# Altium PCB 400926.PcbDoc (part 3 of 7)
Units mm, origin at the board's own origin, x right, y up, seen from the top; angles counter-clockwise.
Board outline 148.5 x 63.5 mm, 4 copper layers (Top Layer, Mid-Layer 1, Mid-Layer 2, Bottom Layer), stack 1.514 mm thick; 311 components, 281 nets, 1495 pads, 2232 vias.
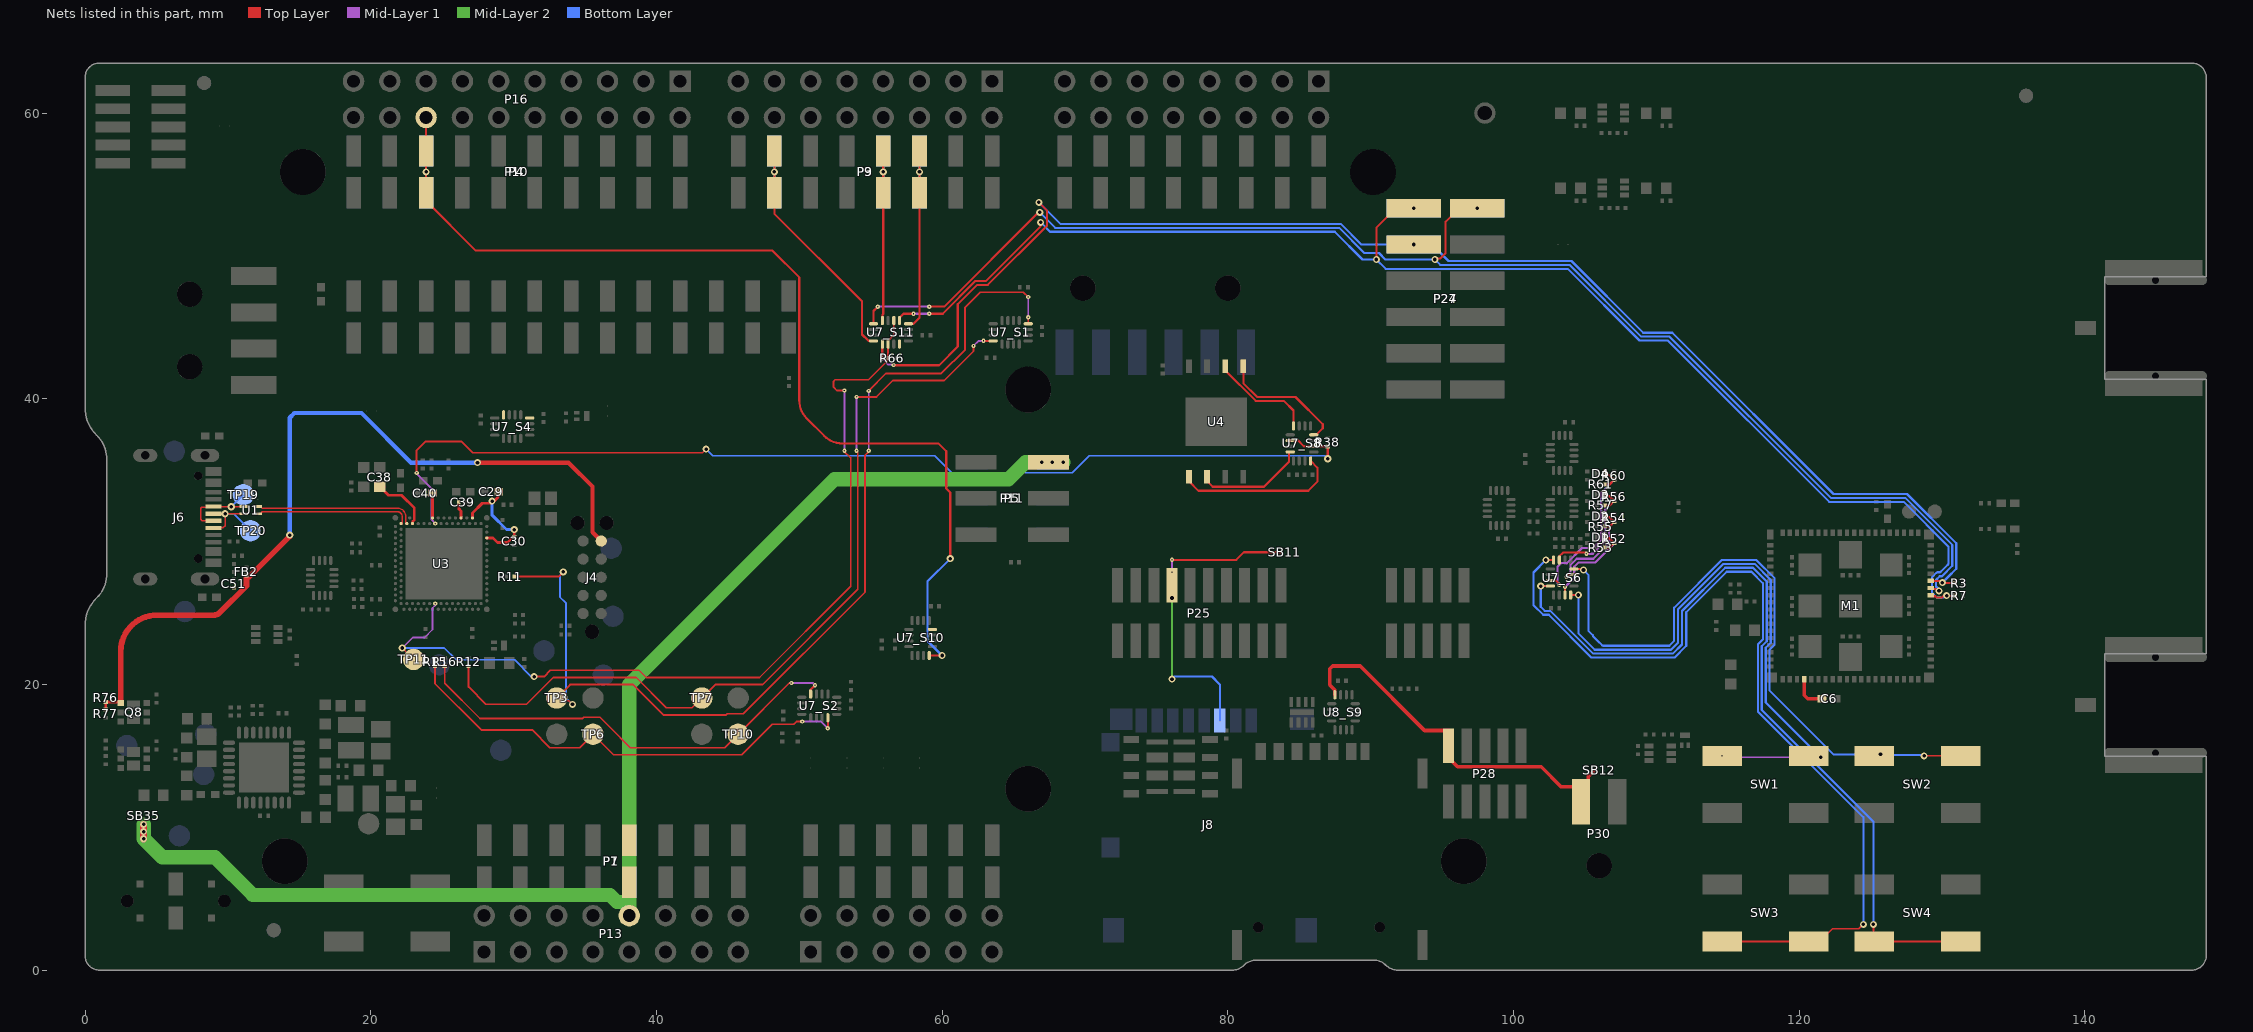
[diagram p4: the nets of this part, all layers, seen from the top]

## Part data (continued)
P26: library part "Socket 1x13 SMD, N.C.", "Socket 1x13, 2.54mm (100mil), SMD", Manufacturer=WCON, Manufacturer Part Number=2171-113MS0CUNR1, Part number IPS=N.A., Part number NEMS=100500422, Artikkelnr Noca=N.A., Assembly="Not mounted", Author=rsk, Component Class=Connectors, Component Status=Active, ComponentLink1Description=Datasheet, ComponentLink1URL=N.A., ComponentLink2Description="Supplier link", ComponentLink2URL=N.A., Footprint Doc=SOCKET_1x13_SMD, HelpURL=N.A., LatestRevisionDate=2019-05-27, Note=N.A., Pad Count=13, Part Number="Socket 1x13 SMD, N.C.", Part number Norautron=N.A., PartId=100500422, Published=2019-05-27, Supplier 1=Cabcon, Supplier 2=Samtec, Supplier Part Number 1=2171-113MS0CUNR1, Supplier Part Number 2=SSM-113-L-SV-P-TR, System=Connector
P28: library part "Pin Header 2x5 SMD, 1.27mm", "Pin Header 2x5, 1.27mm (50mil), SMD", Manufacturer=WCON, Manufacturer Part Number=1325-1205S0M078CR03, Part number IPS=N.A., Part number NEMS=100500259, Artikkelnr Noca=N.A., Author=rsk, Component Class=Connectors, Component Status=Active, ComponentLink1Description=Datasheet, ComponentLink1URL=N.A., ComponentLink2Description="Supplier link", ComponentLink2URL=N.A., Footprint Doc=HDR_2x5-SMD-1.27mm, HelpURL=http://www.farnell.com/datasheets/81359.pdf, LatestRevisionDate=2024-02-02, Note="(Replaced 1325-1205S0M078R1)", Pad Count=10, Part Number="Pin Header 2x5 SMD, 1.27mm", Part number Norautron=N.A., PartId=100500259, Published=2010-11-25, Supplier 1=Cabcon, Supplier 2=N.A., Supplier Part Number 1=1325-1205S0M078CR03, Supplier Part Number 2=N.A., System=Connector
P29: library part "Pin List Ang 1x6 SMD, 2.54mm", "Pin List 1x6, 2.54mm (100mil), Right Angled, SMD", Manufacturer=N.A., Part number IPS=00000003922, Part number NEMS=100500362, Supplier Part Number 1=TSM-106-01-L-SH-A, Artikkelnr Noca=N.A., Assembly="Not mounted", Author=rsk, Component Class=Connectors, Component Status=Active, ComponentLink1Description=Datasheet, ComponentLink1URL=N.A., ComponentLink2Description="Supplier link", ComponentLink2URL=N.A., Footprint Doc=LIST_ANG_1x6-SMD-2.54MM, HelpURL=N.A., LatestRevisionDate=2020-04-28, Manufacturer Part Number=N.A., Note=N.A., Pad Count=6, Part Number="Pin List Ang 1x6 SMD, 2.54mm", Part number Norautron=N.A., PartId=100500362, Published=2015-01-23, Supplier 1=Samtec, Supplier 2=Digi-Key, Supplier Part Number 2=S1113E-06-ND, System=Connector
P30: library part "Pin List Ang 1x2 SMD, 2.54mm", "Pin List 1x2, 2.54mm (100mil), Right Angled, SMD", Manufacturer=WCON, Manufacturer Part Number=1125B-1102S0Z135CR06, Part number IPS=N.A., Part number NEMS=100500354, Artikkelnr Noca=N.A., Author=rsk, Component Class=Connectors, Component Status=Active, ComponentLink1Description=Datasheet, ComponentLink1URL=N.A., ComponentLink2Description="Supplier link", ComponentLink2URL=N.A., Footprint Doc=LIST_ANG_1x2-SMD-2.54MM, HelpURL=\\hizz\pro\app9717\Datasheet\connectors\W-CON\1125B-11XXXXZXXXXX.pdf, LatestRevisionDate=2024-02-02, Note="(Replaced 1125B-1102S0Z135R2)", Pad Count=2, Part Number="Pin List Ang 1x2 SMD, 2.54mm", Part number Norautron=N.A., PartId=100500354, Published=2016-01-22, Supplier 1=Cabcon, Supplier 2=N.A., Supplier Part Number 1=1125B-1102S0Z135CR06, Supplier Part Number 2=N.A., System=Connector
Q1 Q7: "Dual N & P Ch MOFET, 1.03A/0.7A, 480mOhm, 450mW", Manufacturer="Diodes Incorporated", Part number IPS=00000007803, Part number NEMS=101300117, Part number Norautron=N.A., Supplier Part Number 1=DMC2400UV-7DICT-ND, Artikkelnr Noca=N.A., Author=rsk, Component Class=Semiconductors, Component Status=Active, ComponentLink1Description=Datasheet, ComponentLink1URL=N.A., ComponentLink2Description="Supplier link", ComponentLink2URL=N.A., Footprint Doc=SOT-563, HelpURL=http://www.diodes.com/_files/datasheets/DMC2400UV.pdf, LatestRevisionDate=2016-01-18, Manufacturer Part Number=DMC2400UV, Note="Dual N & P Channel Digital FET", Pad Count=6, Part Number=DMC2400UV, PartId=101300117, Published=2016-01-18, Supplier 1=Digi-Key, Supplier 2=N.A., Supplier Part Number 2=N.A.
Q2 Q3 Q6: "N-Channel MOSFET, 20V, 1A, 470mOhm, 400mW, -55°C ~ 150°C", Manufacturer="Rohm Semiconductor", Part number IPS=00000009976, Part number NEMS=101300132, Part number Norautron=26320026, Supplier Part Number 1=RV2C010UNT2LCT-ND, Artikkelnr Noca=35010020, Author=rsk, Component Class=Semiconductors, Component Status=Active, ComponentLink1Description=Datasheet, ComponentLink1URL=N.A., ComponentLink2Description="Supplier link", ComponentLink2URL=N.A., Footprint Doc=DFN-3, HelpURL=http://rohmfs.rohm.com/en/products/databook/datasheet/discrete/transistor/mosfet/rv2c010unt2l-e.pdf, LatestRevisionDate=2024-09-18, Manufacturer Part Number=RV2C010UNT2L, Note=N.A., Pad Count=3, Part Number=RV2C010UNT2L, PartId=101300132, Published=2016-08-09, Supplier 1=Digi-Key, Supplier 2=Mouser, Supplier Part Number 2=755-RV2C010UNT2L
Q4 Q5: "Dual N-Channel MOSFET, Vds = 30V, Vgs(th) = 1.5V, Id = 0.5A, Rds = 750mOhm, Pd = 150mW, -55°C ~ 150°C", Manufacturer="Micro Commercial Components", Manufacturer Part Number=UM6X1NA-TP, Part number IPS=N.A., Part number NEMS=101300201, Supplier Part Number 1=353-UM6X1NA-TPCT-ND, Artikkelnr Noca=N.A., Author=rubr, Component Class=Semiconductors, Component Status=Active, ComponentLink1Description=Datasheet, ComponentLink1URL=https://www.mccsemi.com/pdf/Products/UM6X1NA(SOT-563).pdf, ComponentLink2Description="Supplier link", ComponentLink2URL=https://www.digikey.com/en/products/detail/micro-commercial-co/UM6X1NA-TP/16399159, Footprint Doc=SOT-563, HelpURL=https://www.mccsemi.com/product-detail/UM6X1NA, LatestRevisionDate=2024-09-18, Note=N.A., Pad Count=6, Part Number=UM6X1NA, Part number Norautron=N.A., PartId=101300201, Published=2023-01-19, Supplier 1=Digi-Key, Supplier 2=Mouser, Supplier Part Number 2=833-UM6X1NA-TP
Q8 Q9: "Dual P-Channel MOFET, 3.8A, 90mOhm max, 1.4W", Manufacturer="Micro Commercial Components", Part number IPS=N.A., Part number NEMS=101300199, Supplier Part Number 1=MCM2301-TPMSCT-ND, Artikkelnr Noca=N.A., Author=rubr, Component Class=Semiconductors, Component Status=Active, ComponentLink1Description=Datasheet, ComponentLink1URL=https://www.mccsemi.com/pdf/Products/MCM2301(DFN2020-6L).pdf, ComponentLink2Description="Supplier link", ComponentLink2URL=https://www.digikey.com/en/products/detail/micro-commercial-co/MCM2301-TP/9655971, Footprint Doc=VDFN-6, HelpURL=https://www.mccsemi.com/product-detail/MCM2301, LatestRevisionDate=2022-12-27, Manufacturer Part Number=MCM2301-TP, Note=N.A., Pad Count=6, Part Number=MCM2301-TP, Part number Norautron=N.A., PartId=101300199, Published=2022-12-27, Supplier 1=Digi-Key, Supplier 2=Mouser, Supplier Part Number 2=833-MCM2301-TP
R1 R8 R77 R79: library part R0201-10k, "Resistor, ±1%, 0.05W", Manufacturer=N.A., Part number IPS=00000001255, Part number NEMS=100100065, Part number Norautron=26107101, Artikkelnr Noca=N.A., Author=rsk, Component Class=Resistors, Component Status=Active, ComponentLink1Description=Datasheet, ComponentLink1URL=N.A., ComponentLink2Description="Supplier link", ComponentLink2URL=N.A., Footprint Doc=0201, HelpURL=N.A., LatestRevisionDate=2014-11-13, Manufacturer Part Number=N.A., Note="Chip Res 1%", Pad Count=2, Part Number=R0201-10k, PartId=100100065, Published=2014-11-13, Supplier 1=N.A., Supplier 2=N.A., Supplier Part Number 1=N.A., Supplier Part Number 2=N.A.
R2: library part R0201-1k0, "Resistor, ±1%, 0.05W", Manufacturer=N.A., Part number IPS=00000005786, Part number NEMS=100100043, Artikkelnr Noca=N.A., Author=rsk, Component Class=Resistors, Component Status=Active, ComponentLink1Description=Datasheet, ComponentLink1URL=N.A., ComponentLink2Description="Supplier link", ComponentLink2URL=N.A., Footprint Doc=0201, HelpURL=N.A., LatestRevisionDate=2014-11-13, Manufacturer Part Number=N.A., Note="Chip Res 1%", Pad Count=2, Part Number=R0201-1k0, Part number Norautron=N.A., PartId=100100043, Published=2014-11-13, Supplier 1=N.A., Supplier 2=N.A., Supplier Part Number 1=N.A., Supplier Part Number 2=N.A.
R3 R7 R13 R14 R17 R18 R24 R31 R32 R38 R43 R44 R45 R46 R47 R62 R66 R67 R69 R72 R73 R75 R80: library part R0201-1M0, "Resistor, ±1%, 0.05W", Manufacturer=N.A., Part number IPS=00000001418, Part number NEMS=100100093, Part number Norautron=26107108, Artikkelnr Noca=N.A., Author=rsk, Component Class=Resistors, Component Status=Active, ComponentLink1Description=Datasheet, ComponentLink1URL=N.A., ComponentLink2Description="Supplier link", ComponentLink2URL=N.A., Footprint Doc=0201, HelpURL=N.A., LatestRevisionDate=2014-11-13, Manufacturer Part Number=N.A., Note="Chip Res 1%", Pad Count=2, Part Number=R0201-1M0, PartId=100100093, Published=2014-11-13, Supplier 1=N.A., Supplier 2=N.A., Supplier Part Number 1=N.A., Supplier Part Number 2=N.A.
R9 R23 R59: library part R0201-N.C., "Not mounted", Manufacturer=N.A., Part number NEMS=100100107, Artikkelnr Noca=N.A., Assembly="Not mounted", Author=rsk, Component Class=Resistors, Component Status=Active, ComponentLink1Description=Datasheet, ComponentLink1URL=N.A., ComponentLink2Description="Supplier link", ComponentLink2URL=N.A., Footprint Doc=0201, HelpURL=N.A., LatestRevisionDate=2014-11-13, Manufacturer Part Number=N.A., Note="Chip Res", Pad Count=2, Part Number=R0201-N.C., Part number IPS=N.A., Part number Norautron=N.A., PartId=100100107, Published=2014-11-13, Supplier 1=N.A., Supplier 2=N.A., Supplier Part Number 1=N.A., Supplier Part Number 2=N.A.
R10 R34 R35 R52 R54 R56 R60 R63 R64 R65 R76 R81 R85 R86: library part R0201-100k, "Resistor, ±1%, 0.05W", Manufacturer=N.A., Part number IPS=00000001419, Part number NEMS=100100080, Part number Norautron=26108487, Artikkelnr Noca=N.A., Author=rsk, Component Class=Resistors, Component Status=Active, ComponentLink1Description=Datasheet, ComponentLink1URL=N.A., ComponentLink2Description="Supplier link", ComponentLink2URL=N.A., Footprint Doc=0201, HelpURL=N.A., LatestRevisionDate=2014-11-13, Manufacturer Part Number=N.A., Note="Chip Res 1%", Pad Count=2, Part Number=R0201-100k, PartId=100100080, Published=2014-11-13, Supplier 1=N.A., Supplier 2=N.A., Supplier Part Number 1=N.A., Supplier Part Number 2=N.A.
R11 R12 R15 R16 R19 R20 R22 R25 R26 R27 R28 R29 R30: library part R0201-150, "Resistor, ±1%, 0.05W", Manufacturer=N.A., Part number IPS=00000001420, Part number NEMS=100100029, Artikkelnr Noca=N.A., Author=rsk, Component Class=Resistors, Component Status=Active, ComponentLink1Description=Datasheet, ComponentLink1URL=N.A., ComponentLink2Description="Supplier link", ComponentLink2URL=N.A., Footprint Doc=0201, HelpURL=N.A., LatestRevisionDate=2014-11-13, Manufacturer Part Number=N.A., Note="Chip Res 1%", Pad Count=2, Part Number=R0201-150, Part number Norautron=N.A., PartId=100100029, Published=2014-11-13, Supplier 1=N.A., Supplier 2=N.A., Supplier Part Number 1=N.A., Supplier Part Number 2=N.A.
R21: library part R0201-2R2, "Resistor, ±1%, 0.05W", Manufacturer=N.A., Part number NEMS=100100006, Part number Norautron=26470029, Artikkelnr Noca=N.A., Author=rsk, Component Class=Resistors, Component Status=Active, ComponentLink1Description=Datasheet, ComponentLink1URL=N.A., ComponentLink2Description="Supplier link", ComponentLink2URL=N.A., Footprint Doc=0201, HelpURL=N.A., LatestRevisionDate=2014-11-13, Manufacturer Part Number=N.A., Note="Chip Res 1%", Pad Count=2, Part Number=R0201-2R2, Part number IPS=N.A., PartId=100100006, Published=2014-11-13, Supplier 1=N.A., Supplier 2=N.A., Supplier Part Number 1=N.A., Supplier Part Number 2=N.A.
R33 R39 R40 R41 R42: library part R0201-120, "Resistor, ±1%, 0.05W", Manufacturer=N.A., Part number IPS=00000000880, Part number NEMS=100100028, Part number Norautron=26107076, Artikkelnr Noca=N.A., Author=rsk, Component Class=Resistors, Component Status=Active, ComponentLink1Description=Datasheet, ComponentLink1URL=N.A., ComponentLink2Description="Supplier link", ComponentLink2URL=N.A., Footprint Doc=0201, HelpURL=N.A., LatestRevisionDate=2014-11-13, Manufacturer Part Number=N.A., Note="Chip Res 1%", Pad Count=2, Part Number=R0201-120, PartId=100100028, Published=2014-11-13, Supplier 1=N.A., Supplier 2=N.A., Supplier Part Number 1=N.A., Supplier Part Number 2=N.A.
R36 R74: library part R0201-47k, "Resistor, ±1%, 0.05W", Manufacturer=N.A., Part number IPS=00000001423, Part number NEMS=100100076, Artikkelnr Noca=N.A., Author=rsk, Component Class=Resistors, Component Status=Active, ComponentLink1Description=Datasheet, ComponentLink1URL=N.A., ComponentLink2Description="Supplier link", ComponentLink2URL=N.A., Footprint Doc=0201, HelpURL=N.A., LatestRevisionDate=2014-11-13, Manufacturer Part Number=N.A., Note="Chip Res 1%", Pad Count=2, Part Number=R0201-47k, Part number Norautron=N.A., PartId=100100076, Published=2014-11-13, Supplier 1=N.A., Supplier 2=N.A., Supplier Part Number 1=N.A., Supplier Part Number 2=N.A.
R37 R78: library part R0201-150k, "Resistor, ±1%, 0.05W", Manufacturer=N.A., Part number IPS=00000001422, Part number NEMS=100100082, Artikkelnr Noca=N.A., Author=rsk, Component Class=Resistors, Component Status=Active, ComponentLink1Description=Datasheet, ComponentLink1URL=N.A., ComponentLink2Description="Supplier link", ComponentLink2URL=N.A., Footprint Doc=0201, HelpURL=N.A., LatestRevisionDate=2014-11-13, Manufacturer Part Number=N.A., Note="Chip Res 1%", Pad Count=2, Part Number=R0201-150k, Part number Norautron=N.A., PartId=100100082, Published=2014-11-13, Supplier 1=N.A., Supplier 2=N.A., Supplier Part Number 1=N.A., Supplier Part Number 2=N.A.
R48 R49 R83 R84: library part R0201-4k7, "Resistor, ±1%, 0.05W", Manufacturer=N.A., Part number IPS=00000001706, Part number NEMS=100100061, Artikkelnr Noca=N.A., Author=rsk, Component Class=Resistors, Component Status=Active, ComponentLink1Description=Datasheet, ComponentLink1URL=N.A., ComponentLink2Description="Supplier link", ComponentLink2URL=N.A., Footprint Doc=0201, HelpURL=N.A., LatestRevisionDate=2014-11-13, Manufacturer Part Number=N.A., Note="Chip Res 1%", Pad Count=2, Part Number=R0201-4k7, Part number Norautron=N.A., PartId=100100061, Published=2014-11-13, Supplier 1=N.A., Supplier 2=N.A., Supplier Part Number 1=N.A., Supplier Part Number 2=N.A.
R50 R51: library part R0201-12k, "Resistor, ±1%, 0.05W", Manufacturer=N.A., Part number IPS=00000007891, Part number NEMS=100100066, Part number Norautron=26192279, Artikkelnr Noca=N.A., Author=rsk, Component Class=Resistors, Component Status=Active, ComponentLink1Description=Datasheet, ComponentLink1URL=N.A., ComponentLink2Description="Supplier link", ComponentLink2URL=N.A., Footprint Doc=0201, HelpURL=N.A., LatestRevisionDate=2014-11-13, Manufacturer Part Number=N.A., Note="Chip Res 1%", Pad Count=2, Part Number=R0201-12k, PartId=100100066, Published=2014-11-13, Supplier 1=N.A., Supplier 2=N.A., Supplier Part Number 1=N.A., Supplier Part Number 2=N.A.
R53 R55 R57 R61: library part R0201-18k, "Resistor, ±1%, 0.05W", Manufacturer=N.A., Part number IPS=00000001707, Part number NEMS=100100069, Artikkelnr Noca=N.A., Author=rsk, Component Class=Resistors, Component Status=Active, ComponentLink1Description=Datasheet, ComponentLink1URL=N.A., ComponentLink2Description="Supplier link", ComponentLink2URL=N.A., Footprint Doc=0201, HelpURL=N.A., LatestRevisionDate=2014-11-13, Manufacturer Part Number=N.A., Note="Chip Res 1%", Pad Count=2, Part Number=R0201-18k, Part number Norautron=N.A., PartId=100100069, Published=2014-11-13, Supplier 1=N.A., Supplier 2=N.A., Supplier Part Number 1=N.A., Supplier Part Number 2=N.A.
R58 R87: library part R0201-0R, "Resistor, ±5%, 0.05W", Manufacturer=N.A., Part number IPS=00000003245, Part number NEMS=100100001, Artikkelnr Noca=N.A., Author=rsk, Component Class=Resistors, Component Status=Active, ComponentLink1Description=Datasheet, ComponentLink1URL=N.A., ComponentLink2Description="Supplier link", ComponentLink2URL=N.A., Footprint Doc=0201, HelpURL=N.A., LatestRevisionDate=2017-11-09, Manufacturer Part Number=N.A., Note="Chip Res 5%", Pad Count=2, Part Number=R0201-0R, Part number Norautron=N.A., PartId=100100001, Published=2014-11-13, Supplier 1=N.A., Supplier 2=N.A., Supplier Part Number 1=N.A., Supplier Part Number 2=N.A.
R68: library part R0201-1k87, "Resistor, ±1%, 0.05W", Manufacturer=N.A., Part number NEMS=100100050, Artikkelnr Noca=N.A., Author=rsk, Component Class=Resistors, Component Status=Active, ComponentLink1Description=Datasheet, ComponentLink1URL=N.A., ComponentLink2Description="Supplier link", ComponentLink2URL=N.A., Footprint Doc=0201, HelpURL=N.A., LatestRevisionDate=2019-07-16, Manufacturer Part Number=N.A., Note="Chip Res 1%", Pad Count=2, Part Number=R0201-1k87, Part number IPS=N.A., Part number Norautron=N.A., PartId=100100050, Published=2019-07-16, Supplier 1=N.A., Supplier 2=N.A., Supplier Part Number 1=N.A., Supplier Part Number 2=N.A.
R70 R71: library part R0201-5k1, "Resistor, ±1%, 0.05W", Manufacturer=N.A., Part number NEMS=100100565, Part number Norautron=26192285, Artikkelnr Noca=N.A., Author=rsk, Component Class=Resistors, Component Status=Active, ComponentLink1Description=Datasheet, ComponentLink1URL=N.A., ComponentLink2Description="Supplier link", ComponentLink2URL=N.A., Footprint Doc=0201, HelpURL=N.A., LatestRevisionDate=2016-04-20, Manufacturer Part Number=N.A., Note="Chip Res 1%", Pad Count=2, Part Number=R0201-5k1, Part number IPS=N.A., PartId=100100565, Published=2016-04-20, Supplier 1=N.A., Supplier 2=N.A., Supplier Part Number 1=N.A., Supplier Part Number 2=N.A.
R82: library part R0402-N.C., "Not mounted", Manufacturer=N.A., Part number NEMS=100100281, Artikkelnr Noca=N.A., Assembly="Not mounted", Author=rsk, Component Class=Resistors, Component Status=Active, ComponentLink1Description=Datasheet, ComponentLink1URL=N.A., ComponentLink2Description="Supplier link", ComponentLink2URL=N.A., Footprint Doc=0402, HelpURL=N.A., LatestRevisionDate=2009-05-08, Manufacturer Part Number=N.A., Note="Chip Res", Pad Count=2, Part Number=R0402-N.C., Part number IPS=N.A., Part number Norautron=N.A., PartId=100100281, Published=2009-05-08, Supplier 1=N.A., Supplier 2=N.A., Supplier Part Number 1=N.A., Supplier Part Number 2=N.A.
SB3 SB4 SB5 SB6 SB7 SB8 SB9 SB10 SB14 SB17 SB18 SB21 SB23 SB24 SB25 SB28 SB32: library part "Solderbridge Shorted", "Shorted Solderbridge", Manufacturer=N.A., Part number NEMS=100500459, Artikkelnr Noca=N.A., Author=rsk, Component Class=Connectors, Component Status=Active, ComponentLink1Description=Datasheet, ComponentLink1URL=N.A., ComponentLink2Description="Supplier link", ComponentLink2URL=N.A., Footprint Doc=Solderbridge_Shorted, HelpURL=N.A., LatestRevisionDate=2012-08-07, Manufacturer Part Number=N.A., Note=N.A., Pad Count=2, Part Number="Solderbridge Shorted", Part number IPS=N.A., Part number Norautron=N.A., PartId=100500459, Published=2012-08-07, Supplier 1=N.A., Supplier 2=N.A., Supplier Part Number 1=N.A., Supplier Part Number 2=N.A., System=Connector
SB11 SB12 SB13 SB15 SB16 SB19 SB20 SB22 SB26 SB27 SB29 SB34: Manufacturer=N.A., Part number NEMS=100500458, Artikkelnr Noca=N.A., Author=rsk, Component Class=Connectors, Component Status=Active, ComponentLink1Description=Datasheet, ComponentLink1URL=N.A., ComponentLink2Description="Supplier link", ComponentLink2URL=N.A., Footprint Doc=Solderbridge, HelpURL=N.A., LatestRevisionDate=2009-12-14, Manufacturer Part Number=N.A., Note=N.A., Pad Count=2, Part Number=Solderbridge, Part number IPS=N.A., Part number Norautron=N.A., PartId=100500458, Published=2009-12-14, Supplier 1=N.A., Supplier 2=N.A., Supplier Part Number 1=N.A., Supplier Part Number 2=N.A., System=Connector
SB30 SB31 SB33 SB35: library part "Solderbridge Shorted Power", "Shorted Solderbridge Power", Manufacturer=N.A., Part number NEMS=100500460, Artikkelnr Noca=N.A., Author=rsk, Component Class=Connectors, Component Status=Active, ComponentLink1Description=Datasheet, ComponentLink1URL=N.A., ComponentLink2Description="Supplier link", ComponentLink2URL=N.A., Footprint Doc=Solderbridge_Shorted_Power, HelpURL=N.A., LatestRevisionDate=2012-08-07, Manufacturer Part Number=N.A., Note=N.A., Pad Count=2, Part Number="Solderbridge Shorted Power", Part number IPS=N.A., Part number Norautron=N.A., PartId=100500460, Published=2012-08-07, Supplier 1=N.A., Supplier 2=N.A., Supplier Part Number 1=N.A., Supplier Part Number 2=N.A., System=Connector
SW1 SW2 SW3 SW4 SW5: library part L-KLS7-TS6616B-2.5-160-T, "Tactile Switch, SPNO, SMD, 160gf, 6.2x6.4x2.5mm", Manufacturer=KLS, Part number IPS=N.A., Part number NEMS="101500133, 101500001", Artikkelnr Noca=N.A., Author=masi, Component Class=Switches, Component Status=Active, ComponentLink1Description=Datasheet, ComponentLink1URL=N.A., ComponentLink2Description="Supplier link", ComponentLink2URL=N.A., Footprint Doc=L-KLS7-TS6616B-2.5-160-T, HelpURL=\\hizz\pro\app9717\Datasheet\switches\KLS\L-KLS7-TS6616B-2.5-160-T.pdf, LatestRevisionDate=2021-07-02, Manufacturer Part Number=L-KLS7-TS6616B-2.5-160-T, Note=N.A., Pad Count=4, Part Number=L-KLS7-TS6616B-2.5-160-T, Part number Norautron=N.A., PartId=101500133, Published=2021-07-02, Supplier 1=Cabcon, Supplier 2=N.A., Supplier Part Number 1=L-KLS7-TS6616B-2.5-160-T, Supplier Part Number 2=N.A.
SW6: library part Switch-Slide-RA-J-Lead-DPDT-8.5x3.5mm_C&K, "SMD slide Switch (ON-ON)", Manufacturer=C&K, Manufacturer Part Number=JS202011JAQN, Part number IPS=00000007811, Part number NEMS=101500037, Part number Norautron=N.A., Supplier Part Number 1=CKN10722CT-ND, Artikkelnr Noca=N.A., Author=rsk, Component Class=Switches, Component Status=Active, ComponentLink1Description=Datasheet, ComponentLink1URL=N.A., ComponentLink2Description="Supplier link", ComponentLink2URL=N.A., Footprint Doc=Switch-Slide-RA-J-Lead-DPDT-8.5x3.5mm, HelpURL=http://www.ck-components.com/media/1422/js.pdf, LatestRevisionDate=2017-02-01, Note=N.A., Pad Count=6, Part Number=Switch-Slide-RA-J-Lead-DPDT-8.5x3.5mm_C&K, PartId=101500037, Published=2016-09-15, Supplier 1=Digi-Key, Supplier 2=Mouser, Supplier Part Number 2=611-JS202011JAQN
TP1 TP2: library part TP_SMD_Ø1.0MM, "1.0mm circular SMD testpad", Manufacturer="Nordic Semiconductor", Manufacturer Part Number=N.A., Part number NEMS=100500475, Artikkelnr Noca=N.A., Author=rsk, Component Class=Connectors, Component Status=Active, ComponentLink1Description=Datasheet, ComponentLink1URL=N.A., ComponentLink2Description="Supplier link", ComponentLink2URL=N.A., Footprint Doc=TP_SMD_Ø1.0mm, HelpURL=N.A., LatestRevisionDate=2021-03-05, Note=N.A., Pad Count=1, Part Number=TP_SMD_Ø1.0MM, Part number IPS=N.A., Part number Norautron=N.A., PartId=100500475, Published=2013-06-11, Supplier 1=N.A., Supplier 2=N.A., Supplier Part Number 1=N.A., Supplier Part Number 2=N.A.
TP3 TP4 TP5 TP6 TP7 TP8 TP9 TP10 TP11 TP12 TP13 TP14 TP15 TP16 TP17 TP18 TP19 TP20 TP21 TP22 TP23 TP25 TP26 TP27: library part TP_SMD_Ø1.5MM, "1.5mm circular SMD testpad", Manufacturer="Nordic Semiconductor", Manufacturer Part Number=N.A., Part number NEMS=100500477, Artikkelnr Noca=N.A., Author=rsk, Component Class=Connectors, Component Status=Active, ComponentLink1Description=Datasheet, ComponentLink1URL=N.A., ComponentLink2Description="Supplier link", ComponentLink2URL=N.A., Footprint Doc=TP_SMD_Ø1.5mm, HelpURL=N.A., LatestRevisionDate=2021-03-05, Note=N.A., Pad Count=1, Part Number=TP_SMD_Ø1.5MM, Part number IPS=N.A., Part number Norautron=N.A., PartId=100500477, Published=2016-06-02, Supplier 1=N.A., Supplier 2=N.A., Supplier Part Number 1=N.A., Supplier Part Number 2=N.A.
TP24: library part "Testpoint TH", "Testpoint, through hole", Manufacturer=N.A., Part number NEMS=100500464, Artikkelnr Noca=N.A., Author=rsk, Component Class=Connectors, Component Status=Active, ComponentLink1Description=Datasheet, ComponentLink1URL=N.A., ComponentLink2Description="Supplier link", ComponentLink2URL=N.A., Footprint Doc=TESTPAD-TH, HelpURL=N.A., LatestRevisionDate=2009-12-12, Manufacturer Part Number=N.A., Note=N.A., Pad Count=1, Part Number="Testpoint TH", Part number IPS=N.A., Part number Norautron=N.A., PartId=100500464, Published=2009-12-12, Supplier 1=N.A., Supplier 2=N.A., Supplier Part Number 1=N.A., Supplier Part Number 2=N.A.
U1: "2 Line Common mode filter with ESD protection for USB 2.0 interface, DCRmax = 4Ohm, -40°C ~ 125°C", Manufacturer=STMicroelectronics, Part number IPS=N.A., Part number NEMS=100800034, Supplier Part Number 1=497-13420-2-ND, Artikkelnr Noca=N.A., Author=eisk, Component Class=Filters, Component Status=Active, ComponentLink1Description=Datasheet, ComponentLink1URL=https://www.st.com/content/ccc/resource/technical/document/datasheet/group3/1c/93/cf/72/85/cf/4d/d6/DM00039389/files/DM00039389.pdf/jcr:content/translations/en.DM00039389.pdf, ComponentLink2Description="Supplier link", ComponentLink2URL=https://www.digikey.com/en/products/detail/stmicroelectronics/ECMF02-4CMX8/3770020, Footprint Doc=UFDFN-8, HelpURL=https://www.st.com/content/ccc/resource/technical/document/datasheet/group3/1c/93/cf/72/85/cf/4d/d6/DM00039389/files/DM00039389.pdf/jcr:content/translations/en.DM00039389.pdf, LatestRevisionDate=2024-09-18, Manufacturer Part Number=ECMF02-4CMX8, Note=N.A., Pad Count=8, Part Number=ECMF02-4CMX8, Part number Norautron=N.A., PartId=100800034, Published=2024-01-31, Supplier 1=Digi-Key, Supplier 2=Mouser, Supplier Part Number 2=511-ECMF02-4CMX8
U3: library part nRF5340-QKAAD0, "Multi-protocol Bluetooth Low Energy, IEEE 802.15.4, ANT and 2.4GHz proprietary system-on-chip", Manufacturer="Nordic Semiconductor", Part number IPS=N.A., Part number NEMS=102000216, Part number Norautron=NOD26470035, Artikkelnr Noca=N.A., Author=rsk, Component Class=Nordic_Devices, Component Status=Active, ComponentLink1Description=Datasheet, ComponentLink1URL=N.A., ComponentLink2Description="Supplier link", ComponentLink2URL=N.A., Footprint Doc=AQFN-98, HelpURL=N.A., LatestRevisionDate=2020-12-02, Manufacturer Part Number=nRF5340-QKAAD0, Note=N.A., Pad Count=98, Part Number=nRF5340-QKAAD0, PartId=102000216, Published=2020-12-02, Supplier 1="Nordic Semiconductor", Supplier 2=N.A., Supplier Part Number 1=nRF5340-QKAAD0, Supplier Part Number 2=N.A.
U4: library part GD25WB256EYIGR, "Quad Serial Flash, 256Mbit, 104MHz, 1.65V - 3.6V", Manufacturer=GigaDevice, Part number IPS=N.A., Part number NEMS=101900774, Artikkelnr Noca=N.A., Author=rubr, Component Class=Misc_ICs, Component Status=Active, ComponentLink1Description=Datasheet, ComponentLink1URL=https://www.gigadevice.com.cn/Public/Uploads/uploadfile/files/20220714/DS-00863-GD25WB256E-Rev1.1.pdf, ComponentLink2Description="Supplier link", ComponentLink2URL=N.A., Footprint Doc=WSON-8, HelpURL=https://www.gigadevice.com/product/flash/product-series/spi-nor-flash/gd25wb256e.html, LatestRevisionDate=2023-09-11, Manufacturer Part Number=GD25WB256EYIGR, Note="a med", Pad Count=8, Part Number=GD25WB256EYIGR, Part number Norautron=N.A., PartId=101900774, Published=2023-03-27, Supplier 1=N.A., Supplier 2=N.A., Supplier Part Number 1=N.A., Supplier Part Number 2=N.A.
U5: library part PCAL6408AHK, "8-bit I2C-bus I/O expander with interrupt output", Manufacturer="NXP Semiconductors", Part number IPS=00000009987, Part number NEMS=101900289, Part number Norautron=N.A., Supplier Part Number 1=568-9944-1-ND, Artikkelnr Noca=15079321, Author=rsk, Component Class=Misc_ICs, Component Status=Active, ComponentLink1Description=Datasheet, ComponentLink1URL=N.A., ComponentLink2Description="Supplier link", ComponentLink2URL=N.A., Footprint Doc=XQFN-16, HelpURL=http://www.nxp.com/documents/data_sheet/PCAL6408A.pdf, LatestRevisionDate=2015-04-29, Manufacturer Part Number=PCAL6408AHK, Note=N.A., Pad Count=16, Part Number=PCAL6408AHK, PartId=101900289, Published=2015-04-29, Supplier 1=Digi-Key, Supplier 2=Mouser, Supplier Part Number 2=771-PCAL6408AHKX
U6: library part M2M_UICC, "M2M UICC SIM Card", Manufacturer=N.A., Part number NEMS=101900595, Artikkelnr Noca=N.A., Assembly="Not mounted", Author=rsk, Component Class=Misc_ICs, Component Status=Active, ComponentLink1Description=Datasheet, ComponentLink1URL=N.A., ComponentLink2Description="Supplier link", ComponentLink2URL=N.A., Footprint Doc=SON-8, HelpURL=N.A., LatestRevisionDate=2019-10-22, Manufacturer Part Number=N.A., Note=N.A., Pad Count=8, Part Number=M2M_UICC, Part number IPS=N.A., Part number Norautron=N.A., PartId=101900595, Published=2019-10-22, Supplier 1=N.A., Supplier 2=N.A., Supplier Part Number 1=N.A., Supplier Part Number 2=N.A.
U7_S1 U7_S2 U7_S3 U7_S4 U7_S5 U7_S6 U7_S8 U7_S10 U7_S11: "Data / Audio Low-Voltage Dual DPDT Analog Switch", Manufacturer="ON Semiconductor", Part number IPS=00000009986, Part number NEMS=101900422, Part number Norautron=26500608, Supplier Part Number 1=FSA2466UMXCT-ND, Artikkelnr Noca=15070069, Author=rsk, Component Class=Misc_ICs, Component Status=Active, ComponentLink1Description=Datasheet, ComponentLink1URL=N.A., ComponentLink2Description="Supplier link", ComponentLink2URL=N.A., Footprint Doc=UFQFN-16, HelpURL=https://www.onsemi.com/pub/Collateral/FSA2466-D.PDF, LatestRevisionDate=2019-05-15, Manufacturer Part Number=FSA2466UMX, Note=N.A., Pad Count=16, Part Number=FSA2466UMX, PartId=101900422, Published=2016-05-18, Supplier 1=Digi-Key, Supplier 2=Mouser, Supplier Part Number 2=512-FSA2466UMX
U8_S7 U8_S9: library part NX3DV2567GU, "Low-ohmic four-pole double-throw analog switch", Manufacturer="NXP Semiconductors", Part number IPS=00000007816, Part number NEMS=101900290, Part number Norautron=N.A., Supplier Part Number 1=568-5206-1-ND, Artikkelnr Noca=15079317, Author=rsk, Component Class=Misc_ICs, Component Status=Active, ComponentLink1Description=Datasheet, ComponentLink1URL=N.A., ComponentLink2Description="Supplier link", ComponentLink2URL=N.A., Footprint Doc=XQFN-16, HelpURL=http://www.nxp.com/documents/data_sheet/NX3DV2567.pdf, LatestRevisionDate=2015-02-17, Manufacturer Part Number=NX3DV2567GU, Note=N.A., Pad Count=16, Part Number=NX3DV2567GU, PartId=101900290, Published=2015-02-17, Supplier 1=Digi-Key, Supplier 2=Mouser, Supplier Part Number 2=771-NX3DV2567GU115
U9: "Li-Ion/Li-Polymer USB-C battery charger with high efficiency buck regulators, LDOs or load switches, LED drivers, TWI and VBUSOUT", Manufacturer="Nordic Semiconductor", Part number IPS=N.A., Part number NEMS=102000291, Artikkelnr Noca=N.A., Author=eisk, Component Class=Nordic_Devices, Component Status=Active, ComponentLink1Description=Datasheet, ComponentLink1URL=N.A., ComponentLink2Description="Supplier link", ComponentLink2URL=N.A., Footprint Doc=QFN-32, HelpURL=N.A., LatestRevisionDate=2023-05-25, Manufacturer Part Number=nPM1300-QEAA, Note=N.A., Pad Count=33, Part Number=nPM1300-QEAA, Part number Norautron=N.A., PartId=102000291, Published=2022-02-17, Supplier 1="Nordic Semiconductor", Supplier 2=N.A., Supplier Part Number 1=nPM1300-QEAA, Supplier Part Number 2=N.A.
X1: library part XTAL_SMD2016_32MHz_8pF_Kyocera, "XTAL SMD 2016, 32MHz, Cl=8pF, Tot: ±40ppm", Manufacturer=Kyocera, Manufacturer Part Number=CX2016DB32000D0WZRC1, Part number IPS=00000007827, Part number NEMS=101600039, Part number Norautron=26511136, Supplier Part Number 1=1253-1586-1-ND, Artikkelnr Noca=22010022, Author=rsk, Component Class=Oscillators, Component Status=Active, ComponentLink1Description=Datasheet, ComponentLink1URL=N.A., ComponentLink2Description="Supplier link", ComponentLink2URL=N.A., Footprint Doc=XTAL_2016, HelpURL=http://media.digikey.com/pdf/Data%20Sheets/AVX%20PDFs/CX2016DB32000D0WZRC1_Spec.pdf, LatestRevisionDate=2016-06-02, Note="XTAL SMD 32.000MHz", Pad Count=4, Part Number=XTAL_SMD2016_32MHz_8pF_Kyocera, PartId=101600039, Published=2015-10-15, Supplier 1=Digi-Key, Supplier 2=N.A., Supplier Part Number 2=N.A.
Y1 Y2: library part "SHUNT JUMPER 2.54mm Black Tin", "Shunt Jumper 2.54mm Black, open top", Manufacturer=WCON, Manufacturer Part Number=3710-6001OS0B05, Part number IPS=N.A., Part number NEMS=100500728, Artikkelnr Noca=N.A., Author=masi, Component Class=Connectors, Component Status=Active, ComponentLink1Description=Datasheet, ComponentLink1URL=N.A., ComponentLink2Description="Supplier link", ComponentLink2URL=N.A., Footprint Doc="SHUNT JUMPER 2.54mm", HelpURL=N.A., LatestRevisionDate=2024-08-02, Note=N.A., Pad Count=2, Part Number="SHUNT JUMPER 2.54mm Black Tin", Part number Norautron=N.A., PartId=100500728, Published=2021-06-28, Supplier 1=Cabcon, Supplier 2=N.A., Supplier Part Number 1=3710-6001OS0B05, Supplier Part Number 2=N.A., System=Connector
  Y1: Assembly="Placed on \"VDD\" pins of P22"
  Y2: Assembly="Placed on P30"

## Free pads (board coordinates)
  round 3.2 hole 3.2 unplated: 1(13.97,7.62) 1(15.24,55.88) 1(66.04,12.7) 1(66.04,40.64) 1(90.17,55.88) 1(96.52,7.62)

## Via types
v1: diameter 0.5, hole 0.25, Top Layer to Bottom Layer, tented both sides, 1704 vias
v2: diameter 0.3, hole 0.1, Top Layer to Mid-Layer 1, tented top, 426 vias
v3: diameter 0.3, hole 0.1, Top Layer to Mid-Layer 1, tented both sides, 93 vias
v4: diameter 0.61, hole 0.305, Top Layer to Bottom Layer, tented both sides, 9 vias

## Nets (pads, with @x,y where several pads share a name; then routed paths per layer and width w, separated by ;. In a path a pad name is that pad's centre, name@x,y a point inside that pad or via, vN(x,y) a via of type N, cw(c..) or ccw(c..) an arc to the next point about the centre after c; other vN are vias at no path point)
5V: P1.5 P5.2 P7.5 P11.2 P13.10 SB35.2 | length 90.8
  Top Layer w0.5: v1(4.1,9.199) v1(4.1,9.699) v1(4.1,10.199)
  Mid-Layer 2 w1: v1(4.1,9.199) v1(4.1,9.699) v1(4.1,10.199) ; v1@4.107,9.192 5.4,7.899 9.1,7.899 11.748,5.251 36.748,5.251 37.235,4.764 38.1,4.764 ; P13.10@38.1,3.81 38.1,4.764 ; v1(68.472,35.56) v1(67.722,35.56) v1(66.972,35.56) 65.841,35.56 64.65,34.368 52.469,34.368 38.1,19.999 38.1,4.764
AREF: P4.8 P10.8 P16.16 U7_S10.8 | length 74.8
  Top Layer w0.15: P16.16@23.876,59.69 P4.8@23.876,57.345 v1(23.876,55.88) P4.8@23.876,54.415 23.876,53.848 27.356,50.368 39.539,50.368 39.541,50.367 40.825,50.367 40.826,50.368 48.131,50.368 50,48.499 50,39.886 ccw(c51.8,39.886) 50.524,38.616 51.742,37.399 ccw(c53.012,38.674) 53.012,36.874 59.742,36.874 60.294,36.321 60.294,33.716 60.569,33.441 v1(60.569,28.807) ; U7_S10.8@59.1,22.024 v1(60,22.024) v1@60.086,22.024
  Bottom Layer w0.15: P10.8@23.876,53.848 v1(23.876,55.88) P10.8@23.876,57.345 ; v1(60,22.024) 59.989,22.024 58.975,23.038 58.975,27.212 v1(60.569,28.807)
BTN1_EXT: D1.1 R52.1 R53.2 U7_S6.15 | length 7.3
  Top Layer w0.15: U7_S6.15@103.61,26.258 v2(103.61,26.824) ; R53.2@106.399,29.58 106.723,29.58 v2(107.048,29.905) 106.723,30.23 D1.1@106.399,30.23
  Mid-Layer 1 w0.15: v2(103.61,26.824) 104.26,27.474 104.26,28.235 104.548,28.524 105.71,28.524 107.048,29.862 v2(107.048,29.905)
BTN2_EXT: D2.1 R54.1 R55.2 U7_S6.3 | length 8
  Top Layer w0.15: v2(103.714,27.538) 103.859,27.683 U7_S6.3@104.235,27.683 ; R55.2@106.399,31.054 106.723,31.054 v2(107.048,31.378) 106.723,31.703 D2.1@106.399,31.703
  Mid-Layer 1 w0.15: v2(103.714,27.538) 103.985,27.809 103.985,28.349 104.435,28.799 105.596,28.799 106.698,29.901 106.698,31.028 v2(107.048,31.378)
BTN3_EXT: D3.1 R56.1 R57.2 U7_S6.7 | length 8.6
  Top Layer w0.15: U7_S6.7@103.21,28.708 103.21,28.961 103.481,29.233 104.646,29.233 104.652,29.227 105.032,29.227 v2(105.11,29.149) ; R57.2@106.399,32.527 106.723,32.527 v2(107.048,32.851) 106.723,33.176 D3.1@106.399,33.176
  Mid-Layer 1 w0.15: v2(105.11,29.149) 105.557,29.149 106.423,30.015 106.423,32.226 v2(107.048,32.851)
BTN4_EXT: D4.1 R60.1 R61.2 U7_S6.11 | length 12.1
  Top Layer w0.15: U7_S6.11@102.585,27.283 102.951,27.283 103.21,27.024 v2(103.21,26.974) ; R61.2@106.399,34 106.723,34 v2(107.048,34.325) 106.723,34.649 D4.1@106.399,34.649
  Mid-Layer 1 w0.15: v2(103.21,26.974) 103.085,27.099 103.085,28.228 103.348,28.492 103.721,28.492 103.73,28.483 104.802,29.555 105.574,29.555 106.148,30.129 106.148,33.425 v2(107.048,34.325)
BUTTON1: SW1.2 U7_S6.16 | length 42.6
  Top Layer w0.152: U7_S6.16@104.01,26.258 v1(104.547,26.258)
  Mid-Layer 1 w0.125: v2(114.6,14.999) 114.647,14.999 114.747,14.899 v1(121.5,14.899)
  Bottom Layer w0.15: v1(104.547,26.258) 104.547,23.575 105.694,22.427 111.028,22.427 111.525,22.924 111.525,25.255 114.708,28.437 116.889,28.437 118.012,27.314 118.012,22.912 117.662,22.562 117.662,18.736 v1(121.5,14.899)
BUTTON2: SW2.2 U7_S6.4 | length 45.6
  Top Layer w0.125: v1(128.75,14.999) SW2.2@130.665,14.999
  Top Layer w0.152: U7_S6.4@104.235,28.083 v1@104.904,28.083
  Bottom Layer w0.15: v1(104.904,28.008) 105.267,27.646 105.267,23.733 105.562,23.437 ccw(c105.687,23.438) 105.598,23.35 105.905,23.044 106.211,22.738 ccw(c106.299,22.827) 106.298,22.702 110.903,22.702 111.25,23.049 111.25,25.369 114.594,28.712 117.003,28.712 118.287,27.428 118.287,22.799 117.937,22.449 117.937,19.563 122.401,15.099 v1(125.7,15.099) 125.75,15.049 128.7,15.049 v1(128.75,14.999)
BUTTON3: SW3.2 U7_S6.8 | length 63.1
  Top Layer w0.125: SW3.2@114.815,1.999 SW3.2@120.665,1.999 121.45,1.999 122.337,2.886 124.187,2.886 v1(124.5,3.199)
  Top Layer w0.152: v1(102.273,28.708) U7_S6.8@102.81,28.708
  Bottom Layer w0.15: v1(102.273,28.708) 101.4,27.835 101.4,25.551 102.077,24.874 102.47,24.874 105.467,21.877 111.278,21.877 112.1,22.699 112.1,25.049 114.938,27.887 116.661,27.887 117.462,27.086 117.462,23.14 117.112,22.79 117.112,18.098 124.5,10.71 v1(124.5,3.199)
BUTTON4: SW4.2 U7_S6.12 | length 58.1
  Top Layer w0.125: SW4.2@125.115,1.999 125.2,2.084 v1(125.2,3.199) ; SW4.2@125.265,1.999 SW4.2@131.165,1.999
  Top Layer w0.152: v1(101.915,26.883) U7_S6.12@102.585,26.883
  Bottom Layer w0.15: v1(101.915,26.883) 101.915,25.425 102.191,25.149 102.583,25.149 105.58,22.152 111.153,22.152 111.8,22.799 111.8,25.141 114.822,28.162 116.775,28.162 117.737,27.2 117.737,23.026 117.387,22.676 117.387,18.211 125.2,10.399 v1(125.2,3.199)
COEX0: M1.52 P24.1 P27.1 R7.2 U7_S11.1 | length 97
  Top Layer w0.15: U7_S11.1@57.018,45.474 57.018,45.667 57.3,45.949 v2(58,45.949) ; v2(59.1,45.949) 60.043,45.949 62.343,48.249 63.08,48.249 66.9,52.069 v1(66.9,52.349) ; v1(90.4,49.749) 90.4,51.974 P24.1@91.766,53.34 ; M1.52@129.225,26.249 129.3,26.174 129.53,26.174 129.609,26.096 129.981,26.096 130.032,26.146 130.257,26.146 v1(130.324,26.213) 130.339,26.199 R7.2@130.915,26.199
  Mid-Layer 1 w0.15: v2(58,45.949) v2(59.1,45.949)
  Bottom Layer w0.15: v1(66.9,52.349) 67.559,51.69 87.495,51.69 89.436,49.749 v1(90.4,49.749) 91.054,49.095 103.808,49.095 108.829,44.074 110.814,44.074 122.106,32.782 127.32,32.782 130.45,29.652 130.45,28.486 cw(c130.3,28.486) 130.406,28.38 129.919,27.893 cw(c129.813,27.999) 129.813,27.849 129.712,27.849 ccw(c129.712,27.699) 129.606,27.805 129.348,27.547 ccw(c129.455,27.442) 129.305,27.442 129.305,26.4 129.609,26.096 130.112,26.096 130.23,26.213 v1(130.324,26.213)
  other v1: 93.027,53.34
COEX1: M1.53 P24.2 P27.2 U7_S11.5 | length 99.2
  Top Layer w0.15: U7_S11.5@55.193,45.249 55.193,46.142 v2(55.5,46.449) ; v2(59.1,46.449) 60.154,46.449 66.754,53.049 v1(66.836,53.049) ; v1(94.5,49.749) 94.567,49.816 94.866,49.816 95.254,50.204 95.254,52.392 96.202,53.34 v1(97.472,53.34) ; M1.53@129.225,26.749 129.3,26.749 129.375,26.674 129.572,26.674 129.7,26.546 v1(129.795,26.546)
  Mid-Layer 1 w0.15: v2(55.5,46.449) v2(59.1,46.449)
  Bottom Layer w0.15: v1(66.836,53.049) 67.92,51.965 87.798,51.965 89.564,50.199 90.586,50.199 91.036,49.749 v1(94.5,49.749) 94.513,49.749 94.513,49.736 94.879,49.37 103.922,49.37 108.943,44.349 110.928,44.349 122.22,33.057 127.434,33.057 130.725,29.766 130.725,28.299 130,27.574 129.842,27.574 129.58,27.311 129.58,26.856 129.795,26.64 v1(129.795,26.546)
COEX2: M1.54 P24.3 P27.3 R3.2 U7_S11.9 | length 99.4
  Top Layer w0.15: v2(55.805,42.824) 55.811,42.83 55.811,43.817 U7_S11.9@55.818,43.824 ; v2(56.6,42.361) 56.612,42.349 59.793,42.349 61.1,43.656 61.1,46.617 62.457,47.974 63.194,47.974 67.35,52.13 67.35,53.172 v1(66.773,53.749) ; M1.54@129.225,27.249 129.811,27.249 129.935,27.125 v1(130.03,27.125) 130.043,27.112 130.902,27.112 R3.2@130.915,27.099
  Mid-Layer 1 w0.15: v2(55.805,42.824) 56.239,42.39 56.571,42.39 v2(56.6,42.361)
  Bottom Layer w0.15: v1(66.773,53.749) 68.281,52.241 87.911,52.241 89.352,50.8 v1(93.027,50.8) 94.297,50.8 95.452,49.645 104.063,49.645 109.084,44.624 111.119,44.624 122.411,33.332 127.547,33.332 131,29.88 131,28.095 130.419,27.514 v1(130.03,27.125)
COEX_SELECT: R66.2 TP11.1 U3.AK14 U7_S11.2 U7_S11.10 | length 63.5
  Top Layer w0.125: v1(22.2,22.549) TP11.1@23,21.749 ; v1(31.436,20.549) 32.133,20.549 32.571,20.987 38.78,20.987 39.28,20.486 47.216,20.486 53.6,26.87 53.6,35.859 53.162,36.297 v2(53.162,36.349) ; v2(53.162,40.574) 52.63,40.574 52.4,40.804 52.4,41.224 52.5,41.324 54.85,41.324 56.145,42.619 56.145,42.776 56.218,42.849 U7_S11.10@56.218,43.824 56.218,44.067 56.618,44.467 U7_S11.2@56.618,45.474
  Mid-Layer 1 w0.125: v1(22.2,22.549) 22.937,23.286 23.769,23.286 24.325,23.842 24.325,25.346 v2@24.525,25.546 ; v2@24.49,25.581 24.525,25.616 v2(24.525,25.658) ; v2(53.162,36.349) v2(53.162,40.574)
  Bottom Layer w0.125: v1(22.2,22.549) 24.279,22.549 25.15,22.549 25.975,21.724 30.075,21.724 31.25,20.549 v1(31.436,20.549)
COM.CH1_S1: R11.2 TP3.1 U7_S1.16 | length 73
  Top Layer w0.125: R11.2@30.06,27.549 33.175,27.549 33.475,27.849 v1(33.475,27.874) ; v1(34.125,18.599) 33.875,18.849 33.22,18.849 TP3.1@33.02,19.049 33.957,19.986 38.366,19.986 40.491,17.861 44.887,17.861 44.972,17.946 46.09,17.946 54.6,26.456 54.6,36.034 54.862,36.297 v2(54.862,36.349) ; v2(54.862,40.549) 54.862,40.564 56.073,41.774 59.943,41.774 61.612,43.444 61.612,46.405 62.669,47.461 65.687,47.461 v2(66.025,47.124) ; U7_S1.16@66.025,45.249 v2(66.025,45.699)
  Mid-Layer 1 w0.125: v2(54.862,36.349) v2(54.862,40.549) v2@54.862,40.574 ; v2(66.025,45.699) v2(66.025,47.124)
  Bottom Layer w0.125: v1(33.475,27.874) 33.25,27.649 33.25,26.116 33.662,25.703 33.662,19.061 v1(34.125,18.599)
COM.CH1_S9: P28.2 P30.1 SB12.2 U8_S9.16 | length 26.5
  Top Layer w0.254: U8_S9.16@87.5,19.274 87.498,19.276 87.498,19.614 87.148,19.964 87.148,21.092 87.342,21.286 89.266,21.286 93.778,16.774 95.46,16.774 P28.2@95.46,15.699 95.46,14.864 96.088,14.236 101.942,14.236 103.353,12.824 104.73,12.824 P30.1@104.73,11.799 ; P30.1@105.237,12.927 105.237,13.548 105.688,13.999
COM.CH1_S11: P3.3 P9.3 U7_S11.16 | length 16.1
  Top Layer w0.15: U7_S11.16@57.643,45.249 58,45.249 58.42,45.669 P3.3@58.42,54.415 P3.3@58.42,57.345
  Bottom Layer w0.15: P9.3@58.42,53.823 P9.3@58.42,54.415 v1(58.42,55.88) P9.3@58.42,57.345
COM.CH2_S2: R16.2 TP10.1 U7_S2.4 | length 31.8
  Top Layer w0.125: R16.2@25.175,21.298 25.175,20.087 27.651,17.611 34.83,17.611 34.915,17.696 36.052,17.696 36.747,17.001 36.747,16.998 38.174,15.571 44.782,15.571 TP10.1@45.72,16.509 49.31,20.099 v2(49.45,20.099)
  Top Layer w0.15: U7_S2.4@50.8,19.324 50.8,19.649 v2(51.1,19.949)
  Mid-Layer 1 w0.15: v2(49.45,20.099) 50.95,20.099 v2(51.1,19.949)
COM.CH2_S11: P3.4 P9.4 U7_S11.4 | length 15.4
  Top Layer w0.15: U7_S11.4@55.818,45.474 55.818,45.874 55.88,45.936 P3.4@55.88,54.415 P3.4@55.88,57.345
  Bottom Layer w0.15: P9.4@55.88,53.823 P9.4@55.88,54.415 v1(55.88,55.88) P9.4@55.88,57.345
COM.CH3_S1: R12.2 TP7.1 U7_S1.8 | length 59.3
  Top Layer w0.125: R12.2@26.85,21.298 26.85,19.826 28.065,18.611 30.903,18.611 32.778,20.486 38.573,20.486 40.698,18.361 42.492,18.361 TP7.1@43.18,19.049 44.117,19.986 47.423,19.986 54.1,26.663 54.1,36.261 v2(54.012,36.349) ; v2(54.012,40.124) 55.4,40.124 56.55,41.274 60.15,41.274 62.2,43.324 v2(62.2,43.699) ; v2(62.9,44.051) 62.902,44.049 U7_S1.8@63.575,44.049
  Mid-Layer 1 w0.125: v2(54.012,36.349) v2(54.012,40.124) ; v2@62.175,43.674 v2(62.2,43.699) 62.552,44.051 v2(62.9,44.051)
COM.CH3_S4: U7_S4.8
COM.CH3_S11: P3.7 P9.7 U7_S11.8 | length 19.9
  Top Layer w0.15: P3.7@48.26,57.345 48.26,52.961 54.393,46.828 54.393,44.502 54.846,44.049 U7_S11.8@55.193,44.049
  Bottom Layer w0.15: P9.7@48.26,53.848 P9.7@48.26,54.415 P9.7@48.26,57.345
  other v1: 48.26,55.88
COM.CH4_S2: R15.2 TP6.1 U7_S2.12 | length 33.5
  Top Layer w0.125: R15.2@24.5,21.298 24.5,20.055 27.744,16.812 31.302,16.812 32.542,15.571 34.622,15.571 TP6.1@35.56,16.509 36.997,15.071 45.962,15.071 48.107,17.216 49.621,17.216 49.804,17.399 v2(50.2,17.399)
  Top Layer w0.15: v2(52,16.924) U7_S2.12@52,17.674
  Mid-Layer 1 w0.125: v2(50.2,17.399) 51.525,17.399 v2(52,16.924)
COM.CH4_S4: U7_S4.12
COM.CH4_S10: U7_S10.12
COM.CH4_S11: U7_S11.12
D:J6_N: J6.A7 J6.B7 TP19.1 U1.2 | length 6
  Top Layer w0.1: J6.A7@8.985,31.454 8.245,31.454 cw(c8.245,31.599) 8.1,31.599 8.1,32.299 cw(c8.2,32.299) 8.2,32.399 8.93,32.399 ccw(c8.93,32.454) J6.B7@8.985,32.454 10.145,32.454 10.2,32.399 v1@10.234,32.433 ; v1(10.232,32.435) v1@10.234,32.433 ; U1.2@11.1,32.449 11.093,32.442 10.267,32.442 10.255,32.454 v1@10.234,32.433
  Bottom Layer w0.1: v1@10.234,32.435 v1(10.232,32.435) TP19.1@11.074,33.275 TP19.1@11.074,33.275
D:J6_P: J6.A6 J6.B6 TP20.1 U1.3 | length 6.1
  Top Layer w0.1: J6.B6@8.985,30.954 9.655,30.954 9.8,31.099 v1(9.8,31.949) ; J6.A6@8.985,31.954 8.99,31.949 v1(9.8,31.949) ; U1.3@11.1,31.949 v1(9.8,31.949)
  Bottom Layer w0.1: v1(9.8,31.949) 10.393,31.949 TP20.1@11.582,30.759
D_N: U1.7 U3.B4 | length 11.3
  Top Layer w0.1: U1.7@12.1,32.449 12.3,32.449 12.35,32.399 12.35,32.383 12.409,32.324 21.9,32.324 cw(c21.9,31.774) 22.45,31.774 22.45,31.299 22.491,31.258 U3.B4@22.525,31.258
D_P: U1.6 U3.B2 | length 10.9
  Top Layer w0.1: U1.6@12.1,31.949 12.3,31.949 12.35,31.999 12.35,32.015 12.409,32.074 21.9,32.074 cw(c21.9,31.774) 22.2,31.774 22.2,31.299 22.159,31.258 U3.B2@22.125,31.258 U3.B2@22.12,31.258
DBG_CMD: J8.3 P25.8 SB11.1 | length 20.5
  Top Layer w0.15: v2(76.095,28.719) 80.595,28.719 81.125,29.249 SB11.1@83.65,29.249 83.688,29.249
  Mid-Layer 1 w0.15: v2(76.095,27.849) v2(76.095,28.719)
  Mid-Layer 2 w0.15: v1(76.095,20.374) v1(76.095,26.049)
  Bottom Layer w0.15: v1(76.095,20.374) 76.27,20.549 78.9,20.549 79.45,19.999 J8.3@79.45,17.469
DEC0: C6.1 M1.24 | length 2.2
  Top Layer w0.254: M1.24@120.35,20.374 120.35,19.249 120.6,18.999 C6.1@121.35,18.999
DECA: C40.2 U3.A13 | length 1.9
  Top Layer w0.225: U3.A13@24.325,31.658 C40.2@24.325,33.388 C40.2@24.325,33.563
DECN: C39.1 U3.A23 | length 1.2
  Top Layer w0.2: C39.1@26.159,32.758 26.159,32.299 26.325,32.133 U3.A23@26.325,31.658
DECR: C29.2 C30.1 U3.A27 U3.G31 | length 8.6
  Top Layer w0.2: U3.A27@27.125,31.658 27.125,32.001 27.806,32.683 28.35,32.683 v1(28.5,32.833) ; U3.G31@28.125,30.258 28.55,30.258 28.875,29.933 29.575,29.933 30.046,30.404 v1(30.046,30.842) ; v1@28.55,32.758 28.9,33.108 C29.2@28.9,33.508
  Bottom Layer w0.2: v1(28.5,32.833) 28.5,31.845 29.504,30.842 v1(30.046,30.842)
DECUSB: C38.1 U3.B6 | length 4.2
  Top Layer w0.187: C38.1@20.625,33.833 20.655,33.833 21.246,33.242 22.158,33.242 23.056,32.344 23.056,31.521 22.932,31.397 22.932,31.265 U3.B6@22.925,31.258 ; C38.1@20.925,33.833 C38.1@20.925,33.838
EXT_MEM_C\S\: U4.1 U7_S8.16 | length 11.5
  Top Layer w0.15: U4.1@77.282,34.529 77.282,34.216 77.939,33.56 85.636,33.56 86.273,34.197 86.273,35.176 U7_S8.16@85.8,35.649
EXT_MEM_CTRL: R38.2 U3.B14 U7_S8.2 U7_S8.10 | length 75.1
  Top Layer w0.125: v2(23.212,34.808) 23.212,36.399 23.812,36.999 26.375,36.999 27.15,36.224 43.225,36.224 v1(43.475,36.474)
  Top Layer w0.15: U7_S8.10@84.375,37.074 84.925,37.074 85.325,36.674 U7_S8.2@86.025,36.674 86.989,36.674 R38.2@87.003,36.66 87.003,35.802 v1(87,35.799)
  Mid-Layer 1 w0.125: v2(23.212,34.808) 23.212,34.745 24.262,33.696 24.262,31.521 v2(24.525,31.258)
  Bottom Layer w0.125: v1(43.475,36.474) 43.941,36.007 59.495,36.007 60.679,34.824 69.121,34.824 70.305,36.007 86.791,36.007 v1(87,35.799)
EXT_MEM_MISO: U4.2 U7_S8.12 | length 7.7
  Top Layer w0.15: U4.2@78.552,34.529 78.552,34.221 78.939,33.835 82.536,33.835 84.29,35.589 84.29,36.274 U7_S8.12@84.375,36.274
EXT_MEM_MOSI: U4.5 U7_S8.4 | length 9
  Top Layer w0.15: U4.5@81.092,42.269 81.092,41.095 82.064,40.124 84.745,40.124 86.65,38.219 86.65,37.929 86.195,37.474 U7_S8.4@86.025,37.474
EXT_MEM_SCK: U4.6 U7_S8.8 | length 7.3
  Top Layer w0.15: U4.6@79.822,42.269 79.822,41.976 81.95,39.849 83.925,39.849 84.6,39.174 U7_S8.8@84.6,38.099
FB2:VBUS: C51.2 FB2.2 J4.5 Q8.1 R76.1 R77.1 | length 56.9
  Top Layer w0.2: R77.1@1.45,18.234 R76.1@1.45,18.764 2.43,18.764 Q8.1@2.495,18.699
  Top Layer w0.3: v1(27.475,35.524) 33.85,35.524 35.525,33.849 35.525,30.649 J4.5@36.135,30.039
  Top Layer w0.4: Q8.1@2.495,18.699 2.495,22.309 cw(c5.035,22.309) 5.035,24.849 9.001,24.849 ccw(c9.001,25.449) 9.426,25.025 11.3,26.899 11.3,27.449 11.4,27.549 11.5,27.549 14.306,30.355 14.306,30.43 v1(14.325,30.449)
  Bottom Layer w0.3: v1(14.325,30.449) 14.325,38.674 14.65,38.999 19.35,38.999 22.825,35.524 v1(27.475,35.524)